# EAGLE board CT_schematic (EAGLE 7.6.0)

Size 100 x 80 mm. Coordinates in mm from the lower left corner, seen from the top.
Outline: 0,0 100,0 100,80 0,80 0,0
Copper layers (1*16): Top 0.035mm / dielectric 1.5mm / Bottom 0.035mm
Design rules "default": minimum track width 10mil, minimum drill 24mil, track to track 8mil, track to pad 8mil, pad to pad 8mil, via to via 8mil, smd to smd 8mil, copper to edge 40mil, drill to drill 8mil, minimum pad ring 10mil, minimum via ring 8mil, stop-mask expansion 4mil, vias tented up to drill 0mil, thermal gap 10mil

## Footprints (pad centres in the part's own frame; a part is rotated, then mirrored left to right if it is on the bottom)
C0603 = smd 0.8 x 0.8: 1 -0.762,0; 2 0.762,0
C0402 = smd 0.5 x 0.5: 1 -0.508,0; 2 0.508,0
C0805 = smd 1.2 x 1.3: 1 -1.016,0; 2 1.016,0
C1206 = smd 1.3 x 1.6: 1 -1.524,0; 2 1.524,0
WE-HCI_7030/7040/7050 = smd 2.5 x 3: 1 -2.45,0; 2 2.45,0
R0603 = smd 0.8 x 0.8: 1 -0.762,0; 2 0.762,0
UFBGA64 = smd 0.2 x 0.2: A1 -1.75,1.75; A2 -1.25,1.75; A3 -0.75,1.75; A4 -0.25,1.75; A5 0.25,1.75; A6 0.75,1.75; A7 1.25,1.75; A8 1.75,1.75; B1 -1.75,1.25; B2 -1.25,1.25; B3 -0.75,1.25; B4 -0.25,1.25; B5 0.25,1.25; B6 0.75,1.25; B7 1.25,1.25; B8 1.75,1.25; C1 -1.75,0.75; C2 -1.25,0.75; C3 -0.75,0.75; C4 -0.25,0.75; C5 0.25,0.75; C6 0.75,0.75; C7 1.25,0.75; C8 1.75,0.75; D1 -1.75,0.25; D2 -1.25,0.25; D3 -0.75,0.25; D4 -0.25,0.25; D5 0.25,0.25; D6 0.75,0.25; D7 1.25,0.25; D8 1.75,0.25; E1 -1.75,-0.25; E2 -1.25,-0.25; E3 -0.75,-0.25; E4 -0.25,-0.25; E5 0.25,-0.25; E6 0.75,-0.25; E7 1.25,-0.25; E8 1.75,-0.25; F1 -1.75,-0.75; F2 -1.25,-0.75; F3 -0.75,-0.75; F4 -0.25,-0.75; F5 0.25,-0.75; F6 0.75,-0.75; F7 1.25,-0.75; F8 1.75,-0.75; G1 -1.75,-1.25; G2 -1.25,-1.25; G3 -0.75,-1.25; G4 -0.25,-1.25; G5 0.25,-1.25; G6 0.75,-1.25; G7 1.25,-1.25; G8 1.75,-1.25; H1 -1.75,-1.75; H2 -1.25,-1.75; H3 -0.75,-1.75; H4 -0.25,-1.75; H5 0.25,-1.75; H6 0.75,-1.75; H7 1.25,-1.75; H8 1.75,-1.75
SOIC-8 = smd 1.6 x 0.6: 1 -2.7,1.905 | smd 1.55 x 0.6: 2 -2.7,0.635; 3 -2.7,-0.635; 4 -2.7,-1.905; 5 2.7,-1.905; 6 2.7,-0.635; 7 2.7,0.635; 8 2.7,1.905
TST-110-05-T-D-RA = drill 1 pad 1.7 square: 1 0,0 | drill 1 pad 1.7: 2 0,2.54; 3 2.54,0; 4 2.54,2.54; 5 5.08,0; 6 5.08,2.54; 7 7.62,0; 8 7.62,2.54; 9 10.16,0; 10 10.16,2.54; 11 12.7,0; 12 12.7,2.54; 13 15.24,0; 14 15.24,2.54; 15 17.78,0; 16 17.78,2.54; 17 20.32,0; 18 20.32,2.54; 19 22.86,0; 20 22.86,2.54
TDFN-8/6MM = smd 0.3 x 0.75: 1 0,0; 2 0.5,0; 3 1,0; 4 1.5,0; 5 1.5,3; 6 1,3; 7 0.5,3; 8 0,3
QFN-32 = smd 0.6 x 0.3: 1 -2.3,1.75; 2 -2.3,1.25; 3 -2.3,0.75; 4 -2.3,0.25; 5 -2.3,-0.25; 6 -2.3,-0.75; 7 -2.3,-1.25; 8 -2.3,-1.75; 17 2.3,-1.75; 18 2.3,-1.25; 19 2.3,-0.75; 20 2.3,-0.25; 21 2.3,0.25; 22 2.3,0.75; 23 2.3,1.25; 24 2.3,1.75 | smd 0.3 x 0.6: 9 -1.75,-2.3; 10 -1.25,-2.3; 11 -0.75,-2.3; 12 -0.25,-2.3; 13 0.25,-2.3; 14 0.75,-2.3; 15 1.25,-2.3; 16 1.75,-2.3; 25 1.75,2.3; 26 1.25,2.3; 27 0.75,2.3; 28 0.25,2.3; 29 -0.25,2.3; 30 -0.75,2.3; 31 -1.25,2.3; 32 -1.75,2.3 | smd 3.2 x 3.2: EXP 0,0
SJ-43515TS-SMT-TR = smd 2.2 x 3: 1 0.6,-7.4; 4 3.4,-7.4 | smd 3 x 3: 2 12.8,-7.4; 5 17,-3 | smd 2 x 3: 3 5.3,0; 6 2.5,0 | drill 1.8: P$7 4.5,-3.69; P$8 11.54,-3.69
WM-64PC = drill 0.6 pad 1: 1 -1,0.95; 2 -1,-0.95
FCI_10118193-0001LF = smd 0.4 x 1.35: 1 -1.3,2.675; 2 -0.65,2.675; 3 0,2.675; 4 0.65,2.675; 5 1.3,2.675 | smd 1.6 x 1.4: 6 -3.2,2.45; 7 3.2,2.45 | smd 1.9 x 1.9: 8 -1.2,0; 9 1.2,0 | hole 0.5: -3.3,0; 3.3,0
SOT143B = smd 1 x 0.7: 1 -0.75,-1 | smd 0.6 x 0.7: 2 0.95,-1; 3 0.95,1; 4 -0.95,1
ABS07-32.768KHZ-7-T = smd 1.1 x 2.4: 1 -2.5,0; 2 0,0
ABLS-25.000MHZ-B2F-T = smd 5.6 x 2.8: 1 -3.81,0; 2 5.69,0
ASFL1 = smd 1.7 x 1.5: 1 -1.27,-1.1; 2 1.27,-1.1; 3 1.27,1.1; 4 -1.27,1.1
WSON-8 = smd 0.3 x 0.6: 1 -0.75,0; 2 0.05,0; 3 0.85,0; 4 1.65,0; 5 1.65,3.8; 6 0.85,3.8; 7 0.05,3.8; 8 -0.75,3.8 | smd 3 x 2.6: PAD 0.45,1.9
TSOT-23-5 = smd 1.3 x 0.62: 1 -1.31,0.95; 2 -1.31,0; 3 -1.31,-0.95; 4 1.31,-0.95; 5 1.31,0.95
DFN8_2X3MC = smd 0.813 x 0.305: 1 -1.398,0.75; 2 -1.398,0.25; 3 -1.398,-0.25; 4 -1.398,-0.75; 5 1.398,-0.75; 6 1.398,-0.25; 7 1.398,0.25; 8 1.398,0.75 | smd 1.753 x 1.549: 9 0,0
JST-2-SMD = smd 1 x 4.6: 1 -1,-3.7; 2 1,-3.7 | smd 1.6 x 3.4: NC1 -3.4,1.5; NC2 3.4,1.5
SON-6 = smd 0.55 x 0.3: 1 -0.355,0.5 | smd 0.52 x 0.3: 2 -0.37,0; 3 -0.37,-0.5; 4 0.37,-0.5; 5 0.37,0; 6 0.37,0.5
SW_4-1437565-2 = smd 1.4 x 2.1: 1 -2.23,4.55; 2 -2.23,-4.55; 3 2.23,4.55; 4 2.23,-4.55
LGM67K-G1J2-24-Z = smd 0.8 x 1.4: A -2,0; C 0,0
NC7SZ125M5X = smd 1.3 x 0.7: 1 -1.3,0.95; 2 -1.3,0; 3 -1.3,-0.95; 4 1.3,-0.95; 5 1.3,0.95

## Placement (x,y rotation side)
C1  1e-06  [C0603]  -58.42,72.39 0 top  (outside the outline)
C2  1e-07  [C0603]  -62.23,72.39 0 top  (outside the outline)
C3  1e-07  [C0603]  -66.04,72.39 0 top  (outside the outline)
C4  1e-07  [C0603]  -69.85,72.39 0 top  (outside the outline)
C5  1e-07  [C0603]  -73.66,72.39 0 top  (outside the outline)
C6  1e-07  [C0603]  -77.47,72.39 0 top  (outside the outline)
C7  4.7e-06  [C0603]  -54.61,72.39 0 top  (outside the outline)
C8  1e-08  [C0603]  -81.28,72.39 0 top  (outside the outline)
C9  1e-06  [C0603]  -15.24,77.47 0 top  (outside the outline)
C10  1e-07  [C0603]  -19.05,77.47 0 top  (outside the outline)
C11  1e-11  [C0402]  -22.86,82.55 0 top  (outside the outline)
C12  1e-11  [C0402]  -26.67,82.55 0 top  (outside the outline)
C13  1e-11  [C0402]  -30.48,82.55 0 top  (outside the outline)
C14  1e-11  [C0402]  -34.29,82.55 0 top  (outside the outline)
C15  1e-08  [C0402]  -38.1,82.55 0 top  (outside the outline)
C16  1e-07  [C0402]  -41.91,82.55 0 top  (outside the outline)
C17  1e-07  [C0402]  -45.72,82.55 0 top  (outside the outline)
C18  1e-08  [C0402]  -49.53,82.55 0 top  (outside the outline)
C19  1e-06  [C0603]  -22.86,77.47 0 top  (outside the outline)
C20  1e-06  [C0603]  -26.67,77.47 0 top  (outside the outline)
C21  1e-06  [C0603]  -30.48,77.47 0 top  (outside the outline)
C22  1e-06  [C0603]  -34.29,77.47 0 top  (outside the outline)
C23  1e-06  [C0603]  -38.1,77.47 0 top  (outside the outline)
C24  1e-06  [C0603]  -41.91,77.47 0 top  (outside the outline)
C25  1e-06  [C0603]  -45.72,77.47 0 top  (outside the outline)
C26  1e-07  [C0402]  -53.34,82.55 0 top  (outside the outline)
C27  1e-07  [C0402]  -57.15,82.55 0 top  (outside the outline)
C28  1e-07  [C0402]  -60.96,82.55 0 top  (outside the outline)
C29  1e-07  [C0402]  -64.77,82.55 0 top  (outside the outline)
C30  1e-06  [C0603]  -49.53,77.47 0 top  (outside the outline)
C31  1e-08  [C0402]  -68.58,82.55 0 top  (outside the outline)
C32  1e-08  [C0402]  -72.39,82.55 0 top  (outside the outline)
C33  1e-05  [C0805]  -72.39,59.69 0 top  (outside the outline)
C34  1e-05  [C0805]  -77.47,59.69 0 top  (outside the outline)
C35  1e-05  [C0805]  -15.24,67.31 0 top  (outside the outline)
C36  1e-05  [C0805]  -20.32,67.31 0 top  (outside the outline)
C37  1e-07  [C0402]  -76.2,82.55 0 top  (outside the outline)
C38  1e-05  [C1206]  -48.26,59.69 0 top  (outside the outline)
C39  1e-05  [C1206]  -54.61,59.69 0 top  (outside the outline)
C40  1e-08  [C0402]  -80.01,82.55 0 top  (outside the outline)
C41  1e-08  [C0402]  -15.24,87.63 0 top  (outside the outline)
I1  2e-06  [WE-HCI_7030/7040/7050]  -45.72,21.59 0 top  (outside the outline)
R2  1000.0  [R0603]  -53.34,77.47 0 top  (outside the outline)
R4  4700.0  [R0603]  -57.15,77.47 0 top  (outside the outline)
R5  2200.0  [R0603]  -60.96,77.47 0 top  (outside the outline)
R6  2200.0  [R0603]  -64.77,77.47 0 top  (outside the outline)
R7  10000.0  [R0603]  -58.42,67.31 0 top  (outside the outline)
R8  10000.0  [R0603]  -63.5,67.31 0 top  (outside the outline)
R9  10000.0  [R0603]  -68.58,67.31 0 top  (outside the outline)
R10  10000.0  [R0603]  -73.66,67.31 0 top  (outside the outline)
R11  10000.0  [R0603]  -78.74,67.31 0 top  (outside the outline)
R12  10000.0  [R0603]  -15.24,72.39 0 top  (outside the outline)
R13  10000.0  [R0603]  -20.32,72.39 0 top  (outside the outline)
R14  10000.0  [R0603]  -25.4,72.39 0 top  (outside the outline)
R15  10000.0  [R0603]  -30.48,72.39 0 top  (outside the outline)
R16  10000.0  [R0603]  -35.56,72.39 0 top  (outside the outline)
R17  1270.0  [R0603]  -68.58,77.47 0 top  (outside the outline)
R18  1270.0  [R0603]  -72.39,77.47 0 top  (outside the outline)
R19  100000.0  [R0603]  -38.1,67.31 0 top  (outside the outline)
R20  200.0  [R0603]  -76.2,77.47 0 top  (outside the outline)
R21  1000.0  [R0603]  -80.01,77.47 0 top  (outside the outline)
R22  220000.0  [R0603]  -43.18,67.31 0 top  (outside the outline)
R23  1000000.0  [R0603]  -33.02,67.31 0 top  (outside the outline)
R24  10000.0  [R0603]  -40.64,72.39 0 top  (outside the outline)
R25  10000.0  [R0603]  -45.72,72.39 0 top  (outside the outline)
R26  9100.0  [R0603]  -15.24,82.55 0 top  (outside the outline)
R27  680000.0  [R0603]  -48.26,67.31 0 top  (outside the outline)
R28  120000.0  [R0603]  -53.34,67.31 0 top  (outside the outline)
R29  2000.0  [R0603]  -19.05,82.55 0 top  (outside the outline)
R30  10000.0  [R0603]  -50.8,72.39 0 top  (outside the outline)
U1  STM32L443RCI3  [UFBGA64]  -24.13,44.45 0 top  (outside the outline)
U2  AT25040B-SSHL-T  [SOIC-8]  -66.04,34.29 0 top  (outside the outline)
U3  TST-110-05-T-D-RA  [TST-110-05-T-D-RA]  -46.99,50.8 0 top  (outside the outline)
U4  24AA08T-I/MNY  [TDFN-8/6MM]  -50.8,33.02 0 top  (outside the outline)
U5  SGTL5000XNAA3  [QFN-32]  -34.29,34.29 0 top  (outside the outline)
U6  SJ-43515TS-SMT-TR  [SJ-43515TS-SMT-TR]  -39.37,10.16 0 top  (outside the outline)
U7  SJ-43515TS-SMT-TR  [SJ-43515TS-SMT-TR]  -67.31,10.16 0 top  (outside the outline)
U8  SJ-43515TS-SMT-TR  [SJ-43515TS-SMT-TR]  -39.37,24.13 0 top  (outside the outline)
U9  WM-64PCT  [WM-64PC]  -20.32,34.29 0 top  (outside the outline)
U10  10118193-0001LF  [FCI_10118193-0001LF]  -71.12,43.18 0 top  (outside the outline)
U11  prtr5v0u2ax  [SOT143B]  -27.94,87.63 0 top  (outside the outline)
U12  ABS07-32.768KHZ-7-T  [ABS07-32.768KHZ-7-T]  -27.94,60.96 0 top  (outside the outline)
U13  ABLS-25.000MHZ-B2F-T  [ABLS-25.000MHZ-B2F-T]  -62.23,53.34 0 top  (outside the outline)
U14  ASFL-24.57MHZ-NCS  [ASFL1]  -62.23,44.45 0 top  (outside the outline)
U15  LP3878SDX-ADJ/NOPB  [WSON-8]  -44.45,41.91 0 top  (outside the outline)
U16  ltc3406es5  [TSOT-23-5]  -25.4,66.04 0 top  (outside the outline)
U17  MCP73831T-2ACI/MC  [DFN8_2X3MC]  -38.1,86.36 0 top  (outside the outline)
U18  S2B-PH-SM4-TB(LF)(SN)  [JST-2-SMD]  -78.74,21.59 0 top  (outside the outline)
U19  TPS3895ADRYR  [SON-6]  -31.75,86.36 0 top  (outside the outline)
U20  4-1437565-2  [SW_4-1437565-2]  -64.77,21.59 0 top  (outside the outline)
U21  Q65110A2395  [LGM67K-G1J2-24-Z]  -36.83,60.96 0 top  (outside the outline)
U22  nc7sz125m5x  [NC7SZ125M5X]  -59.69,59.69 0 top  (outside the outline)
U23  nc7sz125m5x  [NC7SZ125M5X]  -66.04,59.69 0 top  (outside the outline)

## Library data of the parts
C1-C41 I1 R2 R4-R30 U1-U23 = circuit_tree

## Nets
CLK_CRYSTAL_U1_A1: C11.1 U1.A1 U12.1
CLK_CRYSTAL_U1_B1: C12.1 U1.B1 U12.2
CLK_CRYSTAL_U1_C1: C13.1 U1.C1 U13.1
CLK_CRYSTAL_U1_D1: C14.1 U1.D1 U13.2
CLK_U5_21: U5.21 U14.3
GND: C1.2 C2.2 C3.2 C4.2 C5.2 C6.2 C7.2 C8.2 C9.2 C10.2 C11.2 C12.2 C13.2 C14.2 C15.2 C16.2 C17.2 C18.2 C26.2 C27.2 C28.2 C29.2 C30.2 C31.2 C32.2 C33.2 C34.2 C35.2 C36.1 C36.2 C37.2 C38.2 C39.2 C40.2 C41.2 R2.2 R7.2 R16.2 R18.2 R21.2 R22.2 R26.2 R28.2 R29.2 U1.C2 U1.D4 U1.D5 U1.D6 U1.F1 U2.4 U3.4 U3.6 U3.8 U3.10 U3.12 U3.14 U3.16 U3.18 U3.20 U4.4 U4.7 U5.1 U5.3 U5.7 U5.EXP U7.1 U8.1 U9.2 U10.5 U10.6 U10.7 U10.8 U10.9 U11.1 U14.2 U15.3 U15.PAD U16.2 U17.6 U17.9 U18.2 U19.2 U21.C U22.2 U22.3 U23.1 U23.3
INPUT_USBPOWER_5V: C38.1 R30.2 U10.1 U11.4 U17.1 U17.2
NET_U1_A3: R6.1 U1.A3 U4.5
NET_U1_B3: R5.1 U1.B3 U4.6
NET_U1_B4: R7.1 U1.B4
NET_U1_E1: R4.1 U1.E1 U23.4
NET_U1_H7: U21.A
NET_U1_H8: U20.3 U20.4
NET_U2_3: R8.1 U2.3
NET_U2_7: R10.1 U2.7
NET_U3_19: R16.1 U3.19
NET_U5_10: C29.1 U5.10
NET_U5_29: R17.1 U5.29
NET_U5_31: R18.1 U5.31
NET_U6_1: U5.4 U6.1
NET_U6_2: U5.2 U6.2
NET_U6_5: U5.6 U6.5
NET_U7_2: C20.1 U7.2
NET_U7_5: C19.1 U7.5
NET_U7_11: C20.2
NET_U7_12: C19.2
NET_U8_2: C22.1 C23.1 U8.2
NET_U8_5: C21.1 U8.5
NET_U8_13: C22.2 C23.2
NET_U8_14: C21.2
NET_U9_1: C24.1 C25.1 C30.1 U5.16 U9.1
NET_U9_15: C24.2 C25.2
NET_U15_1: C32.1 U15.1
NET_U15_6: R20.2 R21.1 U15.6
NET_U15_8: R19.1 U15.8
NET_U16_1: U16.1
NET_U16_3: I1.1 U16.3
NET_U16_5: R22.1 R23.1 U16.5
NET_U16_ATNET_3: I1.2 R23.2
NET_U17_5: R30.1 U17.5
NET_U17_8: R29.1 U17.8
NET_U19_1: R25.1 R26.1 U19.1
NET_U19_3: R27.2 R28.1 U19.3
NET_U19_4: R24.1 U19.4 U22.4 U23.2
NET_U20_1: R2.1 U20.1 U20.2
PROC_SAI1_FS_A: U1.C7 U5.23
PROC_SAI1_SCK_A: U1.D7 U5.24
PROC_SAI1_SD_A: U1.C6 U5.26
PROC_SPI1_MISO: U1.G4 U2.2
PROC_SPI1_MOSI: U1.C4 U2.5
PROC_SPI1_NSS: R9.1 U1.F5 U2.1
PROC_SPI1_SCK: U1.F4 U2.6
PROC_SYS_JTCK_SWCLK: R14.1 U1.A7 U3.9
PROC_SYS_JTDI: R12.1 U1.A6 U3.5
PROC_SYS_JTDO_SWO: U1.A5 U3.13
PROC_SYS_JTMS_SWDIO: R13.1 U1.A8 U3.7
PROC_SYS_JTRST: R11.1 U1.A4 U3.3
PROC_USB_DM: U1.C8 U10.2 U11.3
PROC_USB_DP: U1.B8 U10.3 U11.2
RST_OUT_U3_SRESET_B: R15.1 U3.15 U22.1
VCC_S1_3V7: C33.1 C35.1 C39.1 R19.2 U15.4 U16.4 U17.3 U17.4 U18.1
VCC_TIER1_1V2: C26.1 C34.1 R20.1 U5.30 U15.5
VCC_TIER1_3V3: C1.1 C2.1 C3.1 C4.1 C5.1 C6.1 C7.1 C8.1 C9.1 C10.1 C15.1 C16.1 C17.1 C18.1 C27.1 C28.1 C31.1 C36.2 C37.1 C40.1 C41.1 I1.2 R4.2 R5.2 R6.2 R8.2 R9.2 R10.2 R11.2 R12.2 R13.2 R14.2 R15.2 R17.2 R23.2 R24.2 R25.2 R27.1 U1.B2 U1.D2 U1.E4 U1.E5 U1.E6 U1.H1 U2.8 U3.1 U3.2 U4.8 U5.5 U5.20 U14.4 U19.6 U22.5 U23.5

## Tracks (layer width: path | path; a pad name or v marks a point on that pad's centre or on a via)
CLK_CRYSTAL_U1_A1  (2 unrouted)
CLK_CRYSTAL_U1_B1  (2 unrouted)
CLK_CRYSTAL_U1_C1  (2 unrouted)
CLK_CRYSTAL_U1_D1  (2 unrouted)
CLK_U5_21  (1 unrouted)
GND  (86 unrouted)
INPUT_USBPOWER_5V  (5 unrouted)
NET_U1_A3  (2 unrouted)
NET_U1_B3  (2 unrouted)
NET_U1_B4  (1 unrouted)
NET_U1_E1  (2 unrouted)
NET_U1_H8  (1 unrouted)
NET_U2_3  (1 unrouted)
NET_U2_7  (1 unrouted)
NET_U3_19  (1 unrouted)
NET_U5_10  (1 unrouted)
NET_U5_29  (1 unrouted)
NET_U5_31  (1 unrouted)
NET_U6_1  (1 unrouted)
NET_U6_2  (1 unrouted)
NET_U6_5  (1 unrouted)
NET_U7_2  (1 unrouted)
NET_U7_5  (1 unrouted)
NET_U8_2  (2 unrouted)
NET_U8_5  (1 unrouted)
NET_U8_13  (1 unrouted)
NET_U9_1  (4 unrouted)
NET_U9_15  (1 unrouted)
NET_U15_1  (1 unrouted)
NET_U15_6  (2 unrouted)
NET_U15_8  (1 unrouted)
NET_U16_3  (1 unrouted)
NET_U16_5  (2 unrouted)
NET_U16_ATNET_3  (1 unrouted)
NET_U17_5  (1 unrouted)
NET_U17_8  (1 unrouted)
NET_U19_1  (2 unrouted)
NET_U19_3  (2 unrouted)
NET_U19_4  (3 unrouted)
NET_U20_1  (2 unrouted)
PROC_SAI1_FS_A  (1 unrouted)
PROC_SAI1_SCK_A  (1 unrouted)
PROC_SAI1_SD_A  (1 unrouted)
PROC_SPI1_MISO  (1 unrouted)
PROC_SPI1_MOSI  (1 unrouted)
PROC_SPI1_NSS  (2 unrouted)
PROC_SPI1_SCK  (1 unrouted)
PROC_SYS_JTCK_SWCLK  (2 unrouted)
PROC_SYS_JTDI  (2 unrouted)
PROC_SYS_JTDO_SWO  (1 unrouted)
PROC_SYS_JTMS_SWDIO  (2 unrouted)
PROC_SYS_JTRST  (2 unrouted)
PROC_USB_DM  (2 unrouted)
PROC_USB_DP  (2 unrouted)
RST_OUT_U3_SRESET_B  (2 unrouted)
VCC_S1_3V7  (8 unrouted)
VCC_TIER1_1V2  (4 unrouted)
VCC_TIER1_3V3  (53 unrouted)